# EAGLE board LCmeter0-LCD-8pinlcd-PIC_COMP (EAGLE 7.7.0)
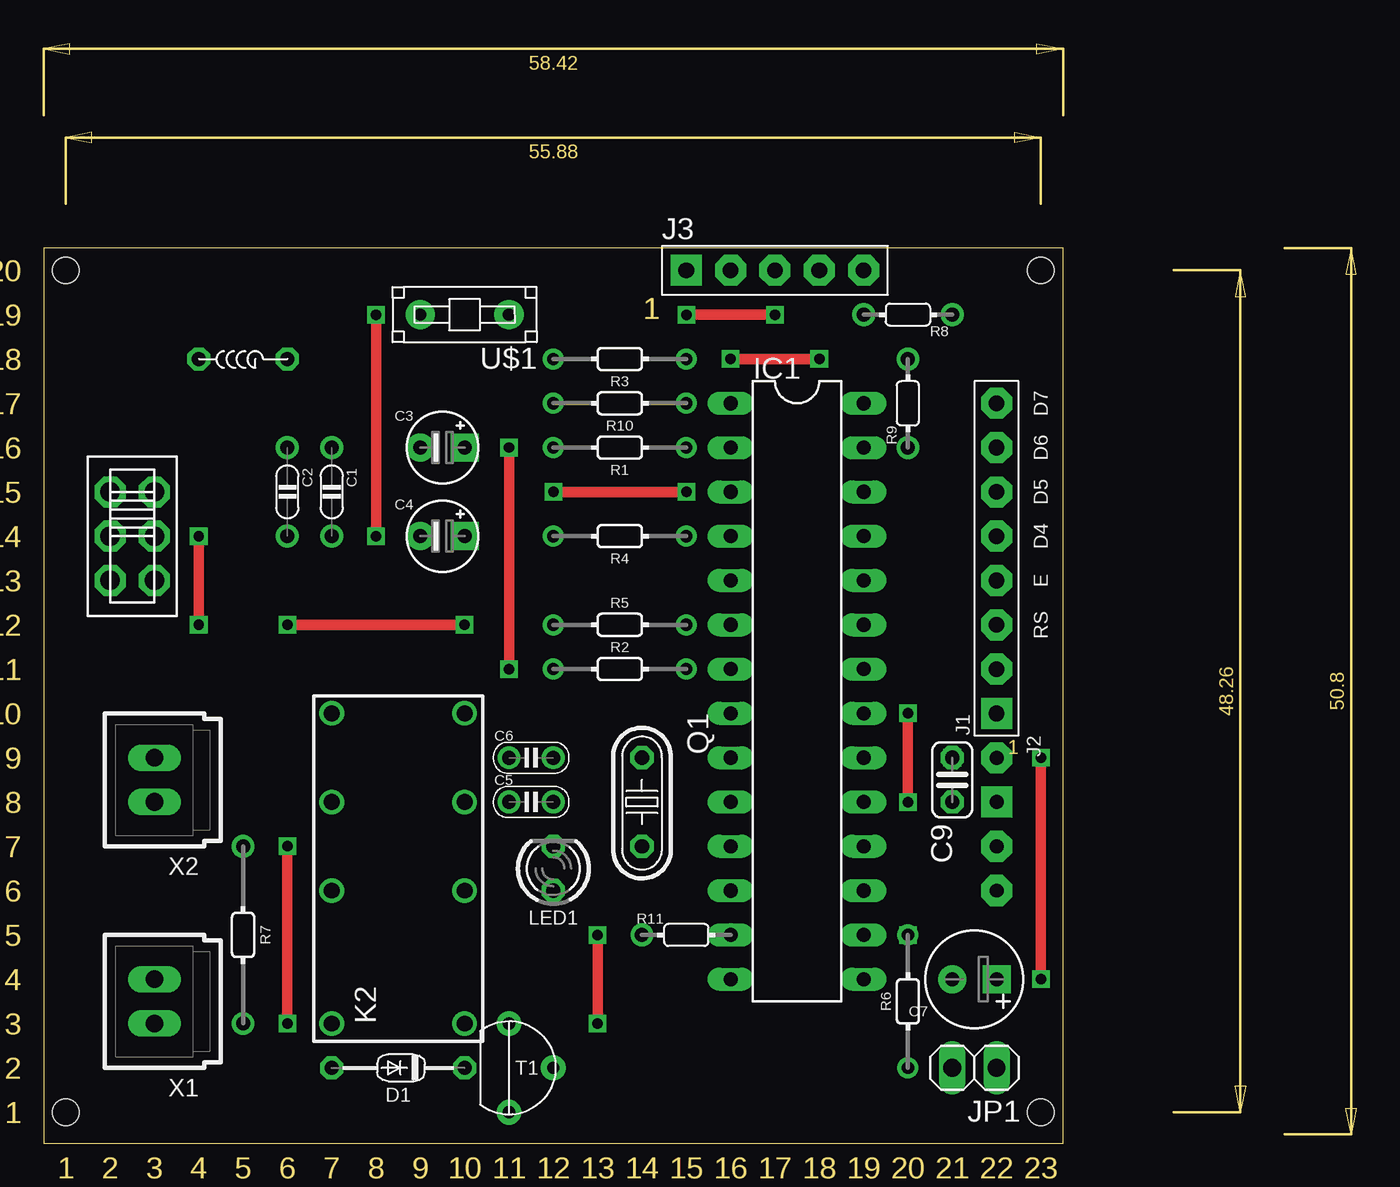
[diagram p0: board, top side]
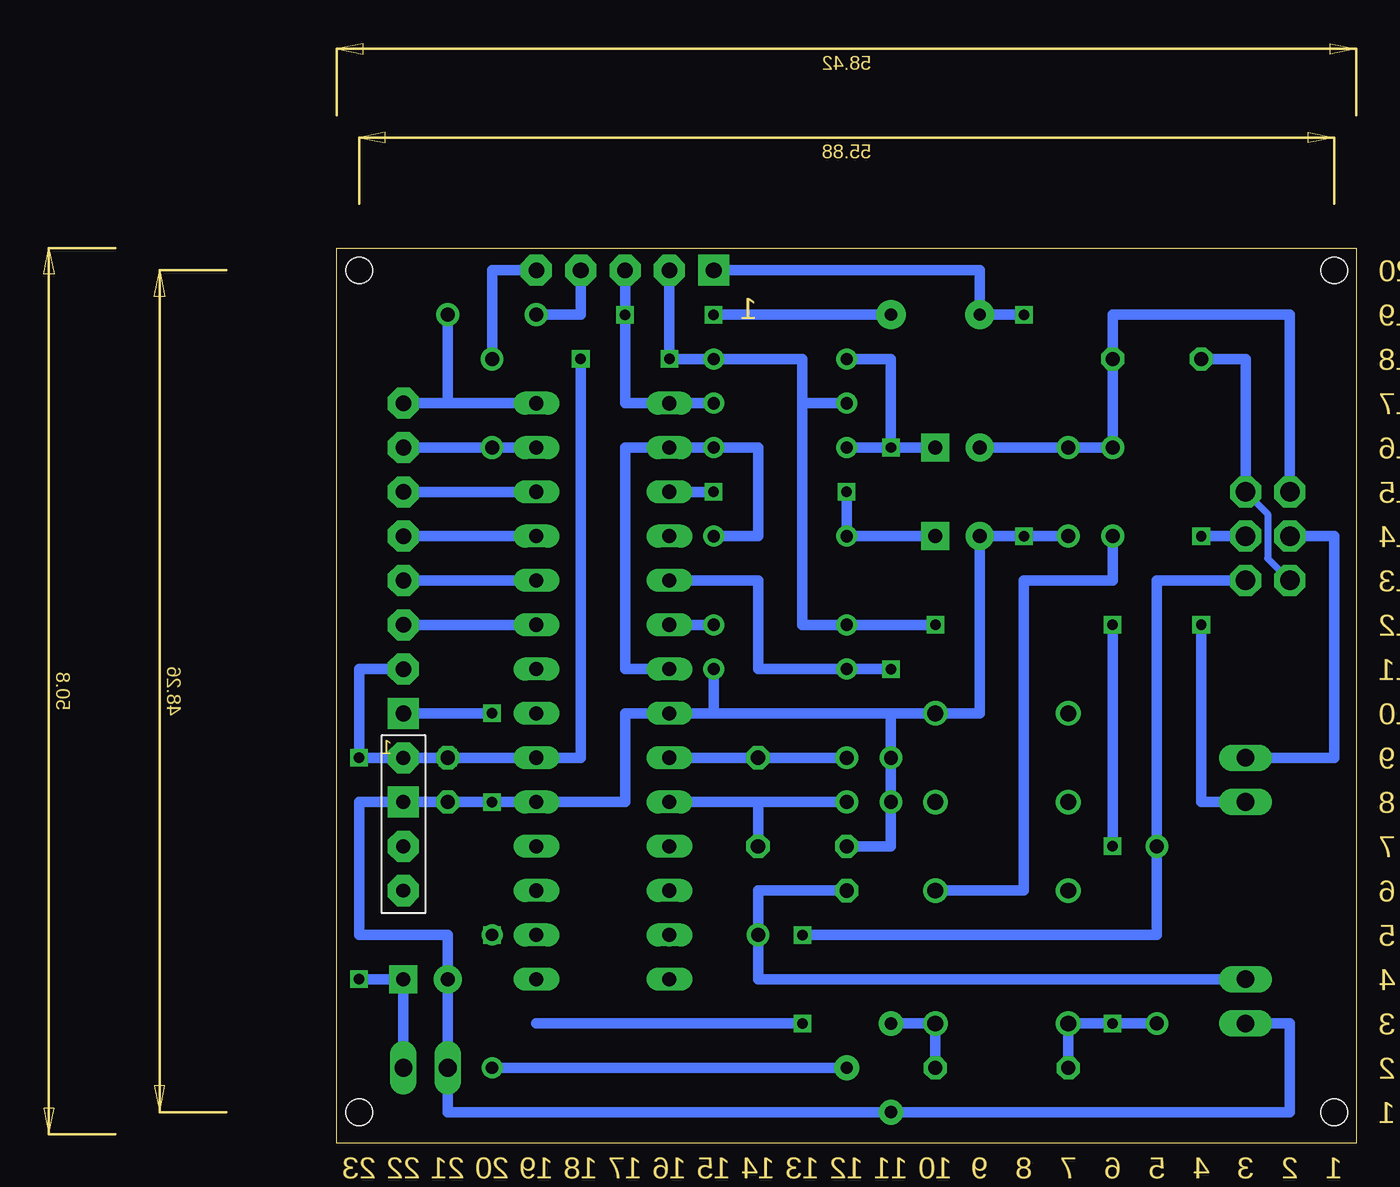
[diagram p1: board, bottom side, seen from below]

Size 58.42 x 51.31 mm. Coordinates in mm from the lower left corner, seen from the top.
Outline: 0,0 58.42,0 58.42,51.31 0,51.31 0,0
Copper layers (1*16): Top 0.035mm / dielectric 1.5mm / Bottom 0.035mm
Design rules "default": minimum track width 10mil, minimum drill 24mil, track to track 8mil, track to pad 8mil, pad to pad 8mil, via to via 8mil, smd to smd 8mil, copper to edge 40mil, drill to drill 8mil, minimum pad ring 10mil, minimum via ring 8mil, stop-mask expansion 4mil, vias tented up to drill 0mil, thermal gap 10mil
Holes 1.5 mm at 1.27,50.04 57.15,50.04 57.15,1.78 1.27,1.78

## Footprints (pad centres in the part's own frame; a part is rotated, then mirrored left to right if it is on the bottom)
C050-020X036 = drill 0.8: 1 -2.54,0; 2 2.54,0
E2,5-4 = drill 0.8 pad 1.6 square: + 1.27,0 | drill 0.8 pad 1.6: - -1.27,0
C025-020X036 = drill 0.8: 1 0,0; 2 2.54,0
E2,5-6 = drill 0.8 pad 1.6 square: + -1.27,0 | drill 0.8 pad 1.6: - 1.27,0
C025-024X044 = drill 0.813 octagon: 1 -1.27,0; 2 1.27,0
DO34-7 = drill 0.813 octagon: A 3.81,0; C -3.81,0
DIL28-3 = drill 0.813 long: 1 -16.51,-3.81; 2 -13.97,-3.81; 3 -11.43,-3.81; 4 -8.89,-3.81; 5 -6.35,-3.81; 6 -3.81,-3.81; 7 -1.27,-3.81; 8 1.27,-3.81; 9 3.81,-3.81; 10 6.35,-3.81; 11 8.89,-3.81; 12 11.43,-3.81; 13 13.97,-3.81; 14 16.51,-3.81; 15 16.51,3.81; 16 13.97,3.81; 17 11.43,3.81; 18 8.89,3.81; 19 6.35,3.81; 20 3.81,3.81; 21 1.27,3.81; 22 -1.27,3.81; 23 -3.81,3.81; 24 -6.35,3.81; 25 -8.89,3.81; 26 -11.43,3.81; 27 -13.97,3.81; 28 -16.51,3.81
CONN-8P = drill 0.9 pad 1.778 square: 1 0,0 | drill 0.9 pad 1.778 octagon: 2 2.54,0; 3 5.08,0; 4 7.62,0; 5 10.16,0; 6 12.7,0; 7 15.24,0; 8 17.78,0
PIC-UART = drill 0.8 pad 1.778 octagon: 17 1.27,1.27; 18 3.81,1.27; 20 8.89,1.27 | drill 0.8 pad 1.778 square: 19 6.35,1.27
CONN-5P = drill 0.9 pad 1.778 square: 1 0,0 | drill 0.9 pad 1.778 octagon: 2 2.54,0; 3 5.08,0; 4 7.62,0; 5 10.16,0
1X02 = drill 1.016 long: 1 -1.27,0; 2 1.27,0
DS2Y = drill 0.9: 1 -8.89,-3.81; 4 -1.27,-3.81; 6 3.81,-3.81; 8 8.89,-3.81; 9 8.89,3.81; 11 3.81,3.81; 13 -1.27,3.81; 16 -8.89,3.81
L-02/5 = drill 0.8 octagon: 1 0,2.54; 2 0,-2.54
LED3MM = drill 0.813 octagon: A -1.27,0; K 1.27,0
HC49 = drill 0.813 octagon: 1 -2.54,0; 2 2.54,0
0202/7 = drill 0.7: 1 -3.81,0; 2 3.81,0
0202/10 = drill 0.8: 1 -5.08,0; 2 5.08,0
0202/5 = drill 0.8: 1 -2.54,0; 2 2.54,0
SLSW-2P2T = drill 1.118 pad 1.778 octagon: 1 -1.27,2.54; 2 -1.27,0; 3 -1.27,-2.54; 4 1.27,2.54; 5 1.27,0; 6 1.27,-2.54
TO92-CBE-A = drill 0.7 pad 1.422: B 2.54,0; C 0,2.54; E 0,-2.54
PB-1P1T = drill 0.7 pad 1.676: 1 2.54,0; 2 -2.54,0
70543-02 = drill 1.016 long: 1 -1.27,0; 2 1.27,0

## Placement (x,y rotation side)
C1  1nF  [C050-020X036]  16.51,37.34 270 top
C2  1nF  [C050-020X036]  13.97,37.34 270 top
C3  10μF  [E2,5-4]  22.86,39.88 0 top
C4  10μF  [E2,5-4]  22.86,34.8 0 top
C5  33pF  [C025-020X036]  26.67,19.56 0 top
C6  33pF  [C025-020X036]  26.67,22.1 0 top
C7  100μF  [E2,5-6]  53.34,9.4 180 top
C9  100nF  [C025-024X044]  52.07,20.83 270 top
D1  1N4148  [DO34-7]  20.32,4.32 180 top
IC1  PIC16F876A-X/SP-COMP-B-A  [DIL28-3]  43.18,25.91 270 top
J1  HD44780-4BIT-8PIN  [CONN-8P]  54.61,24.64 90 top
J2  PIC-UART  [PIC-UART]  55.88,13.21 90 top
J3  PIC-ICSP  [CONN-5P]  36.83,50.04 0 top
JP1  [1X02]  53.34,4.32 180 top
K2  DS2Y  [DS2Y]  20.32,15.75 90 top
L1  100μH  [L-02/5]  11.43,44.96 90 top
LED1  TLLG4400  [LED3MM]  29.21,15.75 90 top
Q1  20MHz  [HC49]  34.29,19.56 270 top
R1  100kΩ  [0202/7]  33.02,39.88 180 top
R2  100kΩ  [0202/7]  33.02,27.18 0 top
R3  100kΩ  [0202/7]  33.02,44.96 180 top
R4  47kΩ  [0202/7]  33.02,34.8 180 top
R5  4.7kΩ  [0202/7]  33.02,29.72 0 top
R6  10kΩ  [0202/7]  49.53,8.13 90 top
R7  10kΩ  [0202/10]  11.43,11.94 270 top
R8  100  [0202/5]  49.53,47.5 180 top
R9  100  [0202/5]  49.53,42.42 90 top
R10  4.7kΩ  [0202/7]  33.02,42.42 180 top
R11  1k  [0202/5]  36.83,11.94 0 top
S1  SL-SW-2P-2T  [SLSW-2P2T]  5.08,34.8 0 top
T1  BC547CBE-A  [TO92-CBE-A]  26.67,4.32 0 top
U$1  PB-1P-1T  [PB-1P1T]  24.13,47.5 180 top
X1  FREQ  [70543-02]  6.35,8.13 90 top
X2  L/C  [70543-02]  6.35,20.83 90 top

## Library data of the parts
C1-C7 = c
C9 = rcl
D1 = d
IC1 = mcu
J1-J3 = pinconn
JP1 = pinhead
K2 = relay; MPN: DS2Y-S-DC5V; OC_FARNELL: unknown; OC_NEWARK: 13P3268
L1 R1-R11 = r
LED1 = led; MF: VISHAY SEMICONDUCTOR; OC_FARNELL: 1612435
Q1 = q
S1 U$1 = sw
T1 = t
X1 X2 = con-molex; OC_FARNELL: unknown; OC_NEWARK: unknown

## Nets
/LC: R7.1 S1.6
/MCLR: IC1.1 J3.3 R10.1 U$1.2
/RELAY: D1.C K2.1 T1.C
A0: IC1.2 IC1.7 R1.1 R4.1
A1: C4.+ IC1.3 R4.2
A3: C3.+ IC1.5 R1.2 R2.1 R3.2
A4: IC1.6 R5.2
C2_CON: C2.2 K2.4
D4: IC1.25 J1.5
D5: IC1.26 J1.6
D6: IC1.27 J1.7 R9.1
D7: IC1.28 J1.8 R8.1
E: IC1.24 J1.4
FREQ: X1.2
GND: C1.2 C4.- C5.1 C6.1 C7.- C9.2 IC1.8 IC1.19 J1.1 J2.19 J3.1 JP1.2 K2.8 LED1.K R2.2 T1.E U$1.1 X1.1
M+: S1.2 X2.2
M-: S1.5 X2.1
N$1: J3.4 R8.2
N$2: C1.1 C2.1 C3.- L1.2 S1.1
N$3: J3.5 R9.2
N$5: R6.1 T1.B
N$6: LED1.A R11.1
N$7: L1.1 S1.3 S1.4
N$8: J2.17
OSC1: C6.2 IC1.9 Q1.1
OSC2: C5.2 IC1.10 Q1.2
RC5: R6.2
RS: IC1.23 J1.3
RX: J2.18
VCC: C7.+ C9.1 D1.A J1.2 J2.20 J3.2 JP1.1 K2.16 R3.1 R5.1 R7.2 R10.2

## Tracks (layer width: path | path; a pad name or v marks a point on that pad's centre or on a via)
/LC  (via drill 0.6)
  Top 0.61: v31.75,11.94 v31.75,6.86
  Bottom 0.61: 46.99,6.86 v31.75,6.86 34.12,6.86 | v31.75,11.94 11.43,11.94 R7.1 11.43,32.26 S1.6
/MCLR  (via drill 0.6)
  Top 0.61: v36.83,47.5 v41.91,47.5
  Bottom 0.61: J3.3 v41.91,47.5 41.91,42.42 IC1.1 R10.1 | v36.83,47.5 U$1.2
/RELAY
  Bottom 0.61: T1.C K2.1 D1.C
A0
  Bottom 0.61: R4.1 34.29,34.8 34.29,39.88 R1.1 IC1.2 41.91,39.88 41.91,27.18 IC1.7
A1  (via drill 0.6)
  Top 0.61: v29.21,37.34 v36.83,37.34
  Bottom 0.61: C4.+ R4.2 v29.21,37.34 | v36.83,37.34 IC1.3
A3  (via drill 0.6)
  Top 0.61: v26.67,39.88 v26.67,27.18
  Bottom 0.61: R3.2 26.67,44.96 v26.67,39.88 | v26.67,39.88 R1.2 | v26.67,27.18 R2.1 34.29,27.18 34.29,32.26 IC1.5 | v26.67,39.88 C3.+
A4
  Bottom 0.61: R5.2 IC1.6
C2_CON
  Bottom 0.61: K2.4 19.05,14.48 19.05,32.26 13.97,32.26 C2.2
D4
  Bottom 0.61: IC1.25 J1.5
D5
  Bottom 0.61: J1.6 IC1.26
D6
  Bottom 0.61: J1.7 R9.1 IC1.27
D7
  Bottom 0.61: R8.1 52.07,42.42 | J1.8 52.07,42.42 | IC1.28 52.07,42.42
E
  Bottom 0.61: J1.4 IC1.24
FREQ
  Bottom 0.61: X1.2 34.29,9.4 34.29,11.94
GND  (via drill 0.6)
  Top 0.61: v49.53,24.64 v49.53,19.56 | v19.05,47.5 v19.05,34.8
  Bottom 0.61: 26.67,24.64 C6.1 C5.1 26.67,17.02 LED1.K | 26.67,24.64 36.83,24.64 | 36.83,24.64 R2.2 | X1.1 3.81,6.86 3.81,1.78 T1.E 52.07,1.78 JP1.2 C7.- 52.07,11.94 57.15,11.94 57.15,19.56 J2.19 C9.2 v49.53,19.56 IC1.19 41.91,19.56 41.91,24.64 IC1.8 36.83,24.64 | 26.67,24.64 K2.8 21.59,24.64 C4.- v19.05,34.8 C1.2 | v49.53,24.64 J1.1 | J3.1 21.59,50.04 U$1.1 v19.05,47.5
M+
  Bottom 0.61: X2.2 1.27,22.1 1.27,34.8 S1.2
M-  (via drill 0.6)
  Top 0.61: v8.89,29.72 v8.89,34.8
  Bottom 0.61: X2.1 8.89,19.56 v8.89,29.72 | v8.89,34.8 S1.5
N$1
  Bottom 0.61: J3.4 44.45,47.5 R8.2
N$2
  Bottom 0.61: C3.- C1.1 C2.1 L1.2 13.97,47.5 3.81,47.5 S1.1
N$3
  Bottom 0.61: J3.5 49.53,50.04 R9.2
N$5
  Bottom 0.61: R6.1 T1.B
N$6
  Bottom 0.61: LED1.A 34.29,14.48 R11.1
N$7
  Bottom 0.406: S1.4 5.08,36.07 5.08,33.53 S1.3
  Bottom 0.61: S1.4 6.35,44.96 L1.1
OSC1
  Bottom 0.61: C6.2 Q1.1 IC1.9
OSC2
  Bottom 0.61: Q1.2 34.29,19.56 | 34.29,19.56 C5.2 | IC1.10 34.29,19.56
RC5  (via drill 0.6)
  other vias: 49.53,11.94
RS
  Bottom 0.61: IC1.23 J1.3
VCC  (via drill 0.6)
  Top 0.61: v57.15,9.4 v57.15,22.1 | v13.97,17.02 v13.97,6.86 | v13.97,29.72 v24.13,29.72 | v44.45,44.96 v39.37,44.96
  Bottom 0.61: D1.A K2.16 v13.97,6.86 R7.2 | J1.2 57.15,27.18 v57.15,22.1 J2.20 C9.1 44.45,22.1 v44.45,44.96 | JP1.1 C7.+ v57.15,9.4 | 31.75,42.42 31.75,29.72 R5.1 v24.13,29.72 | 31.75,42.42 31.75,44.96 R3.1 v39.37,44.96 J3.2 | v13.97,17.02 v13.97,29.72 | R10.2 31.75,42.42
  other vias: 52.07,22.1

## Text on the board
Dimension: 20 | 19 | 18 | 17 | 16 | 15 | 14 | 13 | 12 | 11 | 10 | 9 | 8 | 7 | 6 | 5 | 4 | 3 | 2 | 1 | 1 | 2 | 3 | 4 | 5 | 6 | 7 | 8 | 9 | 10 | 11 | 12 | 13 | 14 | 15 | 16 | 17 | 18 | 19 | 20 | 21 | 22 | 23
tPlace: D7 | D6 | D5 | D4 | E | RS